# Altium PCB FLX-2282-611-PCBV3.3.PcbDoc
Units mm, origin at the board's own origin, x right, y up, seen from the top; angles counter-clockwise.
Board outline 23.4 x 79.5 mm, 2 copper layers (Top Side, Bottom Side), stack 1.879 mm thick; 14 components, 6 nets, 36 pads, 52 vias.
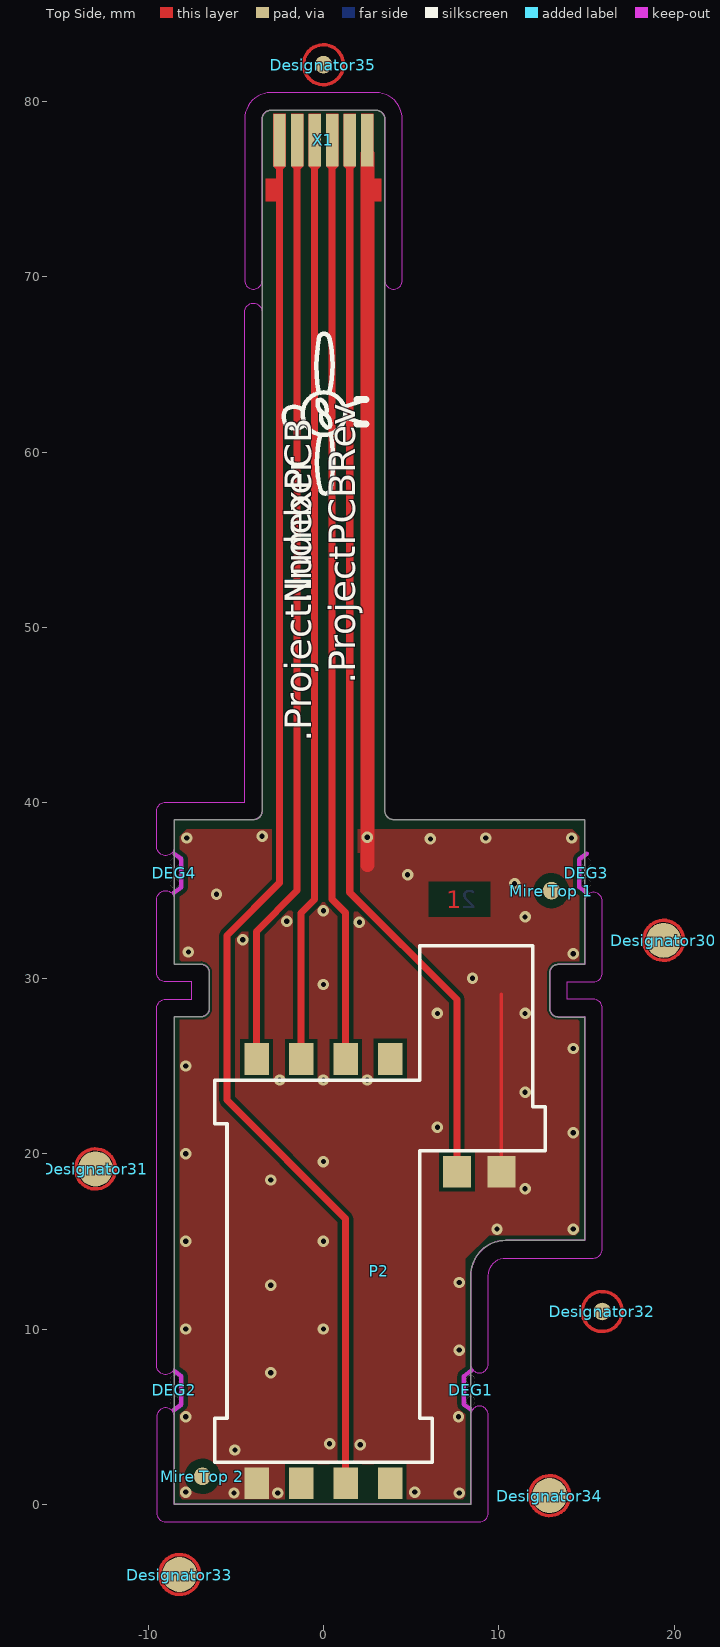
[diagram p0: Top Side view]
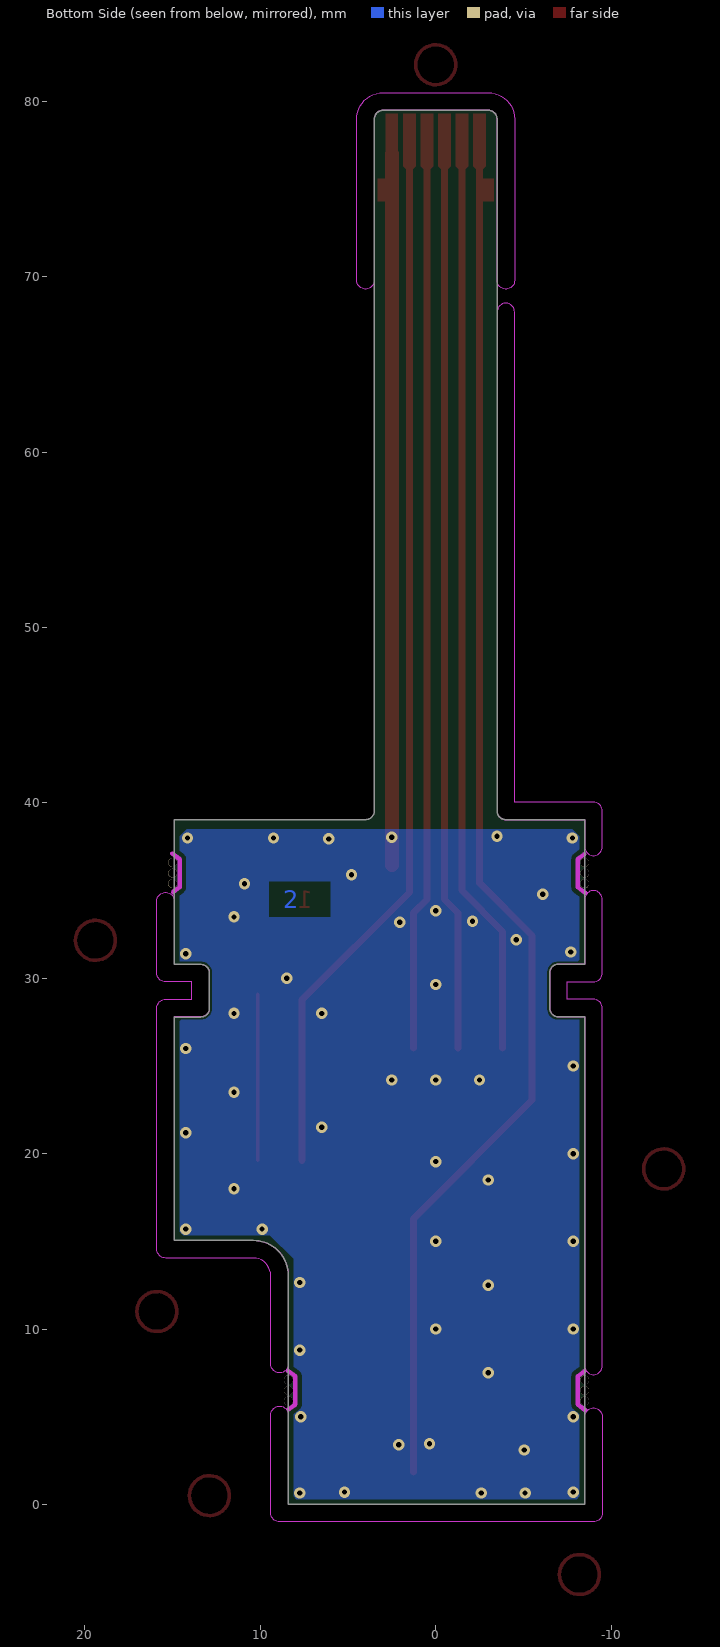
[diagram p1: Bottom Side view, seen from below]

## Layer stack, top to bottom
Top Solder: solder mask 0.012, WE-SM-0001, Dk 4.3
Top Side: signal copper 0.035
Coverlay: core 0.05, WE-PI-0103, Dk 4.188
Adesive: core 0.254, WE-PI-0103, Dk 4.188
Stifener: core 0.02, WE-PI-0103, Dk 4.188
Polyimide: core 1.5, WE-PI-0103, Dk 4.188
Bottom Side: signal copper 0.02
Bottom Solder: solder mask 0.015, WE-SM-0001, Dk 4.3

## Board outline
-8.5,0 -8.5,27.8 -8.5,27.806 -7,27.806 ccw(c-7,28.306) -6.5,28.306 -6.5,30.306 ccw(c-7,30.306) -7,30.806 -8.5,30.806 -8.5,30.8 -8.5,39.05 -4,39.05 ccw(c-4,39.55) -3.5,39.55 -3.5,79 cw(c-3,79) -3,79.5 3,79.5 cw(c3,79) 3.5,79 3.5,39.55 ccw(c4,39.55) 4,39.05 14.9,39.05 14.9,30.8 14.9,30.794 13.4,30.794 ccw(c13.4,30.294) 12.9,30.294 12.9,28.294 ccw(c13.4,28.294) 13.4,27.794 14.9,27.794 14.9,27.8 14.9,15.05 10.4,15.05 ccw(c10.4,13.05) 8.4,13.05 8.4,0
cut-out: -9.5,-0.5 ccw(c-9,-0.5) -9,-1 8.9,-1 ccw(c8.9,-0.5) 9.4,-0.5 9.4,5.1 ccw(c8.9,5.1) 8.4,5.1 8.4,0 -8.5,0 -8.5,5 ccw(c-9,5) -9.5,5
cut-out: -4.5,69.8 ccw(c-4,69.8) -3.5,69.8 -3.5,79 cw(c-3,79) -3,79.5 2.95,79.5 ccw(c2.95,80) 2.975,79.5 ccw(c3,80) 3,79.5 cw(c3,79) 3.5,79.001 cw(c3,79) 3.5,79 cw(c4,79) 3.5,79.001 3.5,79 3.5,69.8 ccw(c4,69.8) 4.5,69.8 4.5,79 ccw(c3,79) 3,80.5 ccw(c3,80) 2.975,80.5 ccw(c2.95,80) 2.95,80.5 -3,80.5 ccw(c-3,79) -4.5,79
cut-out: -9.5,7.9 -9.5,28.3 cw(c-9,28.3) -9,28.8 -7.5,28.8 -7.5,29.8 -9,29.8 cw(c-9,30.3) -9.5,30.3 -9.5,34.5 cw(c-9,34.5) -8.5,34.5 -8.5,30.8 -7,30.8 cw(c-7,30.3) -6.5,30.3 -6.5,28.3 cw(c-7,28.3) -7,27.8 -8.5,27.8 -8.5,7.9 cw(c-9,7.9)
cut-out: -9.5,37.5 -9.5,39.55 cw(c-9,39.55) -9,40.05 -4.5,40.05 -4.5,68 cw(c-4,68) -3.5,68 -3.5,39.55 cw(c-4,39.55) -4,39.05 -8.5,39.05 -8.5,37.5 cw(c-9,37.5)
cut-out: 8.4,8 ccw(c8.9,8) 9.4,8 9.4,13.05 cw(c10.4,13.05) 10.4,14.05 15.4,14.05 ccw(c15.4,14.55) 15.9,14.55 15.9,28.3 ccw(c15.4,28.3) 15.4,28.8 13.9,28.8 13.9,29.8 15.398,29.8 ccw(c15.4,30.3) 15.9,30.3 15.9,34.4 ccw(c15.4,34.4) 14.9,34.4 14.9,30.8 13.4,30.8 ccw(c13.4,30.3) 12.9,30.298 12.9,28.302 ccw(c13.4,28.3) 13.046,27.946 ccw(c13.4,28.3) 13.402,27.8 14.9,27.8 14.9,15.05 10.4,15.05 ccw(c10.4,13.05) 8.4,13.05
board region Flex: 3.5,73.8 3.5,40 -3.5,40 -3.5,73.8
board region Rigide: 3.5,40 3.5,39.55 3.51,39.452 3.584,39.272 3.722,39.134 3.902,39.06 4,39.05 14.9,39.05 14.9,30.794 13.4,30.794 13.302,30.784 13.122,30.709 12.984,30.571 12.91,30.391 12.9,30.294 12.9,28.294 12.91,28.196 12.984,28.016 13.122,27.878 13.302,27.803 13.4,27.794 14.9,27.8 14.9,15.05 10.4,15.05 10.204,15.04 9.819,14.964 9.457,14.814 9.131,14.596 8.854,14.319 8.636,13.993 8.486,13.631 8.41,13.246 8.4,13.05 8.4,0 -8.5,0 -8.5,27.806 -7,27.806 -6.902,27.816 -6.722,27.891 -6.584,28.029 -6.51,28.209 -6.5,28.306 -6.5,30.306 -6.51,30.404 -6.584,30.584 -6.722,30.722 -6.902,30.797 -7,30.806 -8.5,30.8 -8.5,39.05 -4,39.05 -3.902,39.06 -3.722,39.134 -3.584,39.272 -3.51,39.452 -3.5,39.55 -3.5,40
board region Connector: -3.5,73.8 -3.5,79 -3.5,79.099 -3.424,79.283 -3.283,79.424 -3.099,79.5 -3,79.5 3,79.5 3.099,79.5 3.283,79.424 3.424,79.283 3.5,79.099 3.5,79 3.5,73.8

## Design rules (kind name [scope] priority, off if disabled: settings)
AssemblyTestpoint [All] p1: testpointundercomponent=TRUE minsize=1 maxsize=2.54 preferedsize=1.524 minholesize=0 maxholesize=1.016 preferedholesize=0.813 testpointgrid=0.025 usegrid=TRUE gridtolerance=0 allowsidetop=TRUE allowsidebottom=TRUE minspacing=1.27 compbodyclearance=1
BoardOutlineClearance BoardOutlineClearance_DEG2 [Name='Free-DEG'] p1: gap=-2
BoardOutlineClearance BoardOutlineClearance_DEG [InComponent('DEG*')] p2: gap=0
BoardOutlineClearance [All] p3: gap=0.15 except(0: Arc-SplitContinuation Track-SplitContinuation SMDPad-SplitContinuation THPad-SplitContinuation Via-SplitContinuation Fill-SplitContinuation Poly-SplitContinuation Region-SplitContinuation Text-SplitContinuation; 0.3: Text-OutlineEdge Text-CutoutEdge Text-CavityEdge Text-SplitBarrior)
Clearance [All] p1: gap=0.25 except(0.15: Arc-Region Track-Region SMDPad-Region THPad-Region Via-Region Fill-Region Poly-Region Region-Region)
Clearance Clearance_RF [InNet('BLE_OUT') or InNet('BLE_RF')or InNet('BLE_ANT')] p2: gap=0.15
Clearance Clearance_DEGRAP [InComponent('DEG*')] p3: gap=0
ComponentClearance ComponentClearance_DEGG [InComponent('DEG*')] p1: gap=0 collisioncheckmode=3 verticalgap=0 showdistances=FALSE
ComponentClearance ComponentClearance_DEGG_1 [InComponent('Mire Top 2')] p2: gap=-40 collisioncheckmode=3 verticalgap=-40 showdistances=FALSE
ComponentClearance [All] p3: gap=0.3 collisioncheckmode=3 verticalgap=0.254 showdistances=FALSE
DiffPairsRouting [All] p1: maxlimit=0.254 minlimit=0.254 mostfreqgap=0.254 toplayer_minwidth=0.33 toplayer_maxwidth=0.33 toplayer_prefwidth=0.33 bottomlayer_minwidth=0.33 bottomlayer_maxwidth=0.33 bottomlayer_prefwidth=0.33 maxuncoupledlength=12.7
FabricationTestpoint [All] p1: side=3 testpointundercomponent=TRUE minsize=1 maxsize=2.54 preferedsize=1.524 minholesize=0 maxholesize=1.016 preferedholesize=0.813 testpointgrid=0.025 allowsidetop=TRUE allowsidebottom=TRUE usegrid=TRUE gridtolerance=0 minspacing=1.27 compbodyclearance=1 boardedgeclearance=1 padholecenterclearance=1
HoleSize [All] p1: absolutevalues=TRUE maxlimit=250 minlimit=0.1 maxpercent=80.000 minpercent=20.000
HoleToHoleClearance mdViaViaSameLayer [All] p1: gap=0.203 allowstackedmicrovias=TRUE
HoleToHoleClearance [All] p2: gap=0.254 allowstackedmicrovias=TRUE
MatchedLengths [All] p1: tolerance=45 checknetsindiffpair=TRUE checkdiffpairvsdiffpair=FALSE checkxsignals=FALSE checkothers=FALSE
MinimumSolderMaskSliver [All] p1: minsoldermaskwidth=0.075
PasteMaskExpansion [All] p1: expansion=-0.05
PolygonConnect ThermalVias [IsVia] p1: connectstyle=Direct reliefconductorwidth=0.254 reliefentries=4 polygonreliefangle="90 Angle" airgapwidth=0.254
PolygonConnect [All] p2: connectstyle=Direct reliefconductorwidth=0.125 reliefentries=4 polygonreliefangle="90 Angle" airgapwidth=0.254
RoutingVias [All] p1: holewidth=0.3 width=0.65 viastyle="Through Hole" minholewidth=0.1 minwidth=0.25 maxholewidth=49 maxwidth=50
SilkToSilkClearance [All] p1 off: silktosilkclearance=0
SilkToSolderMaskClearance [IsPad] p1 off: minsilkscreentomaskgap=0 clearancetoexposedcopper=TRUE
SolderMaskExpansion [All] p1: expansion=0.075
Width [All] p1: maxlimit=5 minlimit=0.15 preferedwidth=0.25
20 further rules are at their usual default settings.

## Classes and differential pairs
component class "Folio 01": DEG1 DEG2 DEG3 DEG4 "Mire Top 1" "Mire Top 2" P2 X1

## Components (designator, comment, footprint, x,y, rotation, side; value= is the part's Value field where it differs from the comment)
DEG1 "DNI" "DEGRAPAGE 3 x 0.5" 8.4,6.5 r0 top
DEG2 "DNI" "DEGRAPAGE 3 x 0.5" -8.5,6.5 r180 top
DEG3 "DNI" "DEGRAPAGE 3 x 0.5" 15,36 r0 top
DEG4 "DNI" "DEGRAPAGE 3 x 0.5" -8.5,36 r180 top
Designator30 "Comment" MIRE#1 19.4,32.165 r0 top
Designator31 "Comment" MIRE#1 -13,19.13 r0 top
Designator32 "Comment" MIRE#2 15.9,11 r0 top
Designator33 "Comment" MIRE#1 -8.2,-4 r0 top
Designator34 "Comment" MIRE#1 12.9,0.5 r0 top
Designator35 "Comment" MIRE#2 0,82.1 r0 top
"Mire Top 1" "DNI" MIRE#3 13,35 r90 top
"Mire Top 2" "DNI" MIRE#3 -6.9,1.6 r90 top
P2 "7311S0725A01LF" 7311S0725A01LF 0,13.3 r270 top
X1 "HFW6R-1STE1H1LF" FPC_HFW6R-1STE1H1LF 0,79.4 r0 top

## Footprints (in the part's own frame and the unit in brackets; to place one, negate y for a bottom-side part, rotate by r counter-clockwise, add the part's x,y. Pads: shape width x height; smd on the part's side, far side on the other; paste and mask are expansions set on the pad)
7311S0725A01LF [mm] "7311S0725A01LF"
  rect 1.8x1.4 smd: ISO_C1(-12.1,-3.81) ISO_C2(-12.1,-1.27) ISO_C3(-12.1,1.27) ISO_C4(-12.1,3.81) ISO_C5(12.1,-3.81) ISO_C6(12.1,-1.27) ISO_C7(12.1,1.27) ISO_C8(12.1,3.81)
  rect 1.8x1.6 smd: P1(-5.68,7.62) P2(-5.68,10.16)
  silkscreen extent -18.55,-6.2 10.9,12.65, body extent -18.52,-6.2 12.72,12.65, height 2.6
"DEGRAPAGE 3 x 0.5" [mm] "4 TROUS DIAMETRE 0.5mm"
  round 0.5 hole 0.5 unplated paste+0 mask+0: 0(0,-0.6) 0(0,0) 0(0,0.6)
  Keep-Out Layer lines w0.254: -0.024,-1.082 -0.4,-0.8 -0.4,0.8 0.024,1.118
  body extent -0.25,-0.85 0.25,0.85, height 0.2
FPC_HFW6R-1STE1H1LF [mm] "19826331"
  rect 0.7x3 smd paste+0: 1(-2.5,-1.6) 2(-1.5,-1.6) 3(-0.5,-1.6) 4(0.5,-1.6) 5(1.5,-1.6) 6(2.5,-1.6)
  Top Side region: -2.85,-3.1 -2.65,-3.3 -2.65,-3.8 -3.3,-3.8 -3.3,-5.1 -2.65,-5.1 -2.65,-5.6 -2.35,-5.6 -2.35,-3.3 -2.15,-3.1 -2.15,-0.1 -2.85,-0.1 -2.85,-3.1
  Top Side region: -1.85,-3.1 -1.65,-3.3 -1.65,-5.6 -1.35,-5.6 -1.35,-3.3 -1.15,-3.1 -1.15,-0.1 -1.85,-0.1 -1.85,-3.1
  Top Side region: -0.85,-3.1 -0.65,-3.3 -0.65,-5.6 -0.35,-5.6 -0.35,-3.3 -0.15,-3.1 -0.15,-0.1 -0.85,-0.1 -0.85,-3.1
  Top Side region: 0.15,-3.1 0.35,-3.3 0.35,-5.6 0.65,-5.6 0.65,-3.3 0.85,-3.1 0.85,-0.1 0.15,-0.1 0.15,-3.1
  Top Side region: 1.15,-3.1 1.35,-3.3 1.35,-5.6 1.65,-5.6 1.65,-3.3 1.85,-3.1 1.85,-0.1 1.15,-0.1 1.15,-3.1
  Top Side region: 2.85,-3.1 2.65,-3.3 2.65,-3.8 3.3,-3.8 3.3,-5.1 2.65,-5.1 2.65,-5.6 2.35,-5.6 2.35,-3.3 2.15,-3.1 2.15,-0.1 2.85,-0.1 2.85,-3.1
  body extent -3.5,-5.8 3.5,-0.1, height 0.04
MIRE#1 [mm] "Mire"
  round 2 smd mask+0.5: ""(0,0)
  Top Side circle w0.2: c0,0 r1.14
MIRE#2 [mm] "Mire"
  round 1 smd mask+0.5: ""(0,0)
  Top Side circle w0.2: c0,0 r1.14
MIRE#3 [mm] "Mire dans Polygone - 1mm/2mm - Validee Indus"
  round 1 smd paste+0 mask+0.4: 0(0,0)
  Top Side pour cut-out: -0.995,-0.105 -0.987,-0.168 -0.981,-0.195 -0.972,-0.234 -0.966,-0.261 -0.955,-0.301 -0.944,-0.331 -0.929,-0.368 -0.918,-0.398 -0.898,-0.441 -0.868,-0.497 -0.844,-0.537 -0.814,-0.58 -0.795,-0.608 -0.748,-0.662 -0.713,-0.701 -0.671,-0.743 -0.611,-0.792 -0.578,-0.817 -0.531,-0.847 -0.488,-0.873 -0.442,-0.897 -0.406,-0.913 -0.368,-0.93 -0.327,-0.945 -0.287,-0.958 -0.253,-0.968 -0.217,-0.976 -0.175,-0.983 -0.136,-0.991 -0.069,-0.998 0.009,-1 0.126,-0.993 0.174,-0.985 0.221,-0.976 0.262,-0.965 0.319,-0.948 0.362,-0.933 0.417,-0.909 0.465,-0.885 0.512,-0.86 0.541,-0.84 0.578,-0.817 0.618,-0.785 0.654,-0.757 0.713,-0.701 0.775,-0.633 0.801,-0.599 0.83,-0.558 0.855,-0.519 0.876,-0.486 0.893,-0.448 0.917,-0.4 0.94,-0.342 0.96,-0.28 0.972,-0.234 0.99,-0.147 0.998,-0.07 1,0.002 0.995,0.093 0.984,0.182 0.972,0.232 0.957,0.289 0.943,0.331 0.921,0.391 0.893,0.448 0.866,0.502 0.828,0.56 0.793,0.611 0.742,0.67 0.681,0.731 0.631,0.776 0.578,0.817 0.538,0.845 0.504,0.864 0.465,0.886 0.432,0.902 0.391,0.92 0.341,0.94 0.299,0.954 0.256,0.968 0.207,0.979 0.157,0.987 0.106,0.995 0.034,1 -0.061,0.998 -0.138,0.991 -0.185,0.983 -0.246,0.97 -0.289,0.957 -0.343,0.941 -0.384,0.924 -0.434,0.901 -0.47,0.884 -0.51,0.861 -0.551,0.835 -0.595,0.805 -0.636,0.772 -0.682,0.731 -0.722,0.691 -0.778,0.63 -0.818,0.575 -0.844,0.537 -0.868,0.497 -0.902,0.432 -0.923,0.384 -0.946,0.325 -0.964,0.265 -0.977,0.215 -0.995,0.1 -0.999,0.066 -1.001,0.009

## Part data
DEG1 DEG2 DEG3 DEG4: "Dégrapage (Breakout Tab)"
"Mire Top 1" "Mire Top 2": library part Mire, "Mire"
P2: "8 Positions connecteur de carte Micro SIM Montage en surface à angle droit Or avec commutateur"
X1: library part FPC_HFW6R-1STE1H1LF, "Connecteur FCC 6pts 1mm - bottom contect- right angle - 6x1mm"

## Via types
v1: diameter 0.65, hole 0.3, Top Side to Bottom Side, tented both sides, 52 vias

## Nets (pads, with @x,y where several pads share a name; then routed paths per layer and width w, separated by ;. In a path a pad name is that pad's centre, name@x,y a point inside that pad or via, vN(x,y) a via of type N, cw(c..) or ccw(c..) an arc to the next point about the centre after c; other vN are vias at no path point)
GND: P2.ISO_C5 P2.P2 X1.6 | length 50
  Top Side w0.2: P2.P2@10.15,19.615 10.15,29.1
  Top Side w0.8: 2.5,36.45 v1(2.5,38.05) X1.6@2.5,77
  other v1: -5.1,0.65 -2.6,0.65 7.75,0.65 -7.85,0.7 5.2,0.7 -5.05,3.1 2.1,3.4 0.35,3.45 -7.85,5 7.7,5 -3,7.5 7.75,8.8 -7.85,10 0,10 -3,12.5 7.75,12.65 -7.85,15 0,15 9.9,15.7 14.25,15.7 11.5,18 -3,18.5 0,19.55 -7.85,20 14.25,21.2 6.5,21.5 11.5,23.5 -2.5,24.2 0,24.2 2.5,24.2 -7.85,25 14.25,26 6.5,28 11.5,28 0,29.65 8.5,30 14.25,31.4 -7.7,31.5 -4.6,32.2 2.05,33.2 -2.1,33.25 11.5,33.5 0,33.85 -6.1,34.8 10.9,35.4 4.8,35.9 6.1,37.95 -7.8,38 9.25,38 14.15,38 -3.5,38.1
MCU_SC_PRES: P2.ISO_C1 X1.2 | length 51.9
  Top Side w0.4: P2.ISO_C1@-3.82,26.035 -3.82,32.68 -1.5,35 X1.2@-1.5,77
SC_PRES_SW: P2.P1 X1.5 | length 59.9
  Top Side w0.4: X1.5@1.5,77 1.5,34.9 7.61,28.79 P2.P1@7.61,19.615
SC_RST: P2.ISO_C2 X1.3 | length 51.3
  Top Side w0.4: P2.ISO_C2@-1.28,26.035 -1.28,33.72 -0.5,34.5 X1.3@-0.5,77
SC_USART_CLK: P2.ISO_C3 X1.4 | length 51.3
  Top Side w0.4: X1.4@0.5,77 0.5,34.5 1.26,33.74 P2.ISO_C3@1.26,26.035
SC_USART_TX: P2.ISO_C7 X1.1 | length 79.2
  Top Side w0.4: X1.1@-2.5,77 -2.5,35.45 -5.5,32.45 -5.5,23.05 1.26,16.29 P2.ISO_C7@1.26,1.835
pads on no net: "Mire Top 1.0" "Mire Top 2.0" DEG1.0 DEG2.0 DEG3.0 DEG4.0 Designator30. Designator31. Designator32. Designator33. Designator34. Designator35. P2.ISO_C4 P2.ISO_C6 P2.ISO_C8

## Polygon pours and split planes (outlines as drawn)
GND on Top Side "TOP_GND" (solid, remove dead copper, pour order 0): -7.8,38.5 -8.2,38.1 -8.2,0.45 -8.05,0.3 7.95,0.3 8.1,0.45 8.1,14 9.45,15.35 14.4,15.35 14.6,15.55 14.6,38.1 14.2,38.5
GND on Bottom Side "BOT_GND" (solid, remove dead copper, pour order 2): -7.8,38.5 -8.2,38.1 -8.2,0.45 -8.05,0.3 7.95,0.3 8.1,0.45 8.1,14 9.45,15.35 14.4,15.35 14.6,15.55 14.6,38.1 14.2,38.5

## Other copper
Top Side:
  pour cut-out: -0.4,2.3 3,2.3 3,0 -0.4,0
  pour cut-out: -2.5,37.15 -2.5,35.45 -5.3,32.65 -3.85,32.65 -2.65,33.85 -1.15,33.85 -0.65,34.35 0.7,34.35 1.25,33.8 2.6,33.8 2.1,34.3 2.1,37.15
  text "1" at 7,34 h1
Bottom Side:
  text "2" at 8.7,34 h1
Multi-Layer:
  pour cut-out: 6,35.5 6,33.5 9.5,33.5 9.5,35.5

## Silkscreen, mask and mechanical layers (free items; w line width, h text height)
Top Overlay:
  circle w0.254: c0.026,62.203 r1.217
  lines w0.254: -2.144,61.579 cw(c-1.411,62.018) -2.174,62.403 cw(c-1.676,61.875) -1.175,62.401 ; -2.092,61.552 ccw(c-1.606,62.043) -1.074,61.603 ; -0.318,62.956 ccw(c0.312,62.788) 0.026,62.203 cw(c-0.259,61.617) 0.37,61.45 ; -0.28,63.41 cw(c8.802,64.881) -0.265,66.44 cw(c0.035,66.461) 0.321,66.548 cw(c-5.835,64.966) 0.326,63.403 ; -0.174,61.003 ccw(c5.988,59.439) -0.169,57.857 ccw(c0.118,57.945) 0.417,57.966 ccw(c-8.65,59.525) 0.432,60.995 ; -0.174,63.003 cw(c-0.459,62.417) 0.128,62.136 ; -0.09,62.237 ccw(c0.512,61.988) 0.226,61.403 ; 1.226,62.003 2.126,61.703 ; 1.226,62.603 2.126,62.903
  lines w0.4: 1.926,61.603 2.426,61.603 ; 1.926,63.003 2.426,63.003
  text ".IndexPCB" at -0.7,51.4 h1.52 r90
  text ".ProjectPCBRev" at 1.8,46.8 h1.52 r90
  text ".ProjectNumber" at -0.7,43.5 h1.52 r90
02 - Outline:
  lines w0.2: -8.5,27.8 -8.5,0 8.4,0 ; -8.5,27.806 -7,27.806 ccw(c-7,28.306) -6.5,28.306 -6.5,30.306 ccw(c-7,30.306) -7,30.806 -8.5,30.806 ; -8.5,30.8 -8.5,39.05 -4,39.05 ccw(c-4,39.55) -3.5,39.55 -3.5,79 cw(c-3,79) -3,79.5 3,79.5 cw(c3,79) 3.5,79 3.5,39.55 ccw(c4,39.55) 4,39.05 14.9,39.05 14.9,30.8 ; 14.9,27.794 13.4,27.794 cw(c13.4,28.294) 12.9,28.294 12.9,30.294 cw(c13.4,30.294) 13.4,30.794 14.9,30.794 ; 14.9,27.8 14.9,15.05 10.4,15.05 ccw(c10.4,13.05) 8.4,13.05 8.4,0 ; 8.4,0 8.4,0
03 - DXF:
  drawing of 848 lines, arcs and shapes, not listed
10 - Spec PCB:
  drawing of 163 lines, arcs and shapes, not listed
  text "PCB DEFINITION" at 53.043,86.758 h2
  text "ROHS            UL94V0                 TG>=150°C" at 50.113,84.748 h1.3
  text "X" at 48.813,84.648 h1.3
  text "X" at 65.42,84.648 h1.3
  text "LOW CTE      SMI" at 50.113,83.748 h1.3
  text "X" at 48.813,83.648 h1.3
  text "RIGIDE          FLEX RIGID          FLEX" at 50.113,82.718 h1.3
  text "X" at 56.31,82.638 h1.3
  text "X" at 65.45,82.6 h1.3
  text "if flex, kapton thickness :" at 54.113,81.668 h1.3
  text "FLEX RIGIDE - 3 zones" at -76.5,81 h3
  text "HAL                Electroless NI/AU" at 50.113,80.668 h1.3
  text "X" at 56.313,80.558 h1.3
  text "ELECTRICAL TEST : To be done on all pcb 100%" at 50.123,79.338 h1.3
  text "X" at 48.823,79.238 h1.3
  text "DATASHEET OF LAMINATE TO BE SUPPLIED" at 50.123,77.958 h1.3
  text "X" at 48.833,77.828 h1.3
  text "CONTROLLED IMPEDANCE" at 50.123,76.628 h1.3
  text "RIGIDE" at -65,76 h1
  text "FLEX - FPC" at -53,76 h1
  text "CONNECTOR" at -38.5,76 h1
  text "CONNECTOR / REGION" at 10,75.9 h2
  text "COC CERTIFICATE OF CONFORMITY" at 50.103,75.198 h1.3
  text "X" at 48.803,75.098 h1.3
  text "Cover film" at -82,74 h1
  text "12.5" at -64,74 h1
  text "12.5" at -51,74 h1
  text "12.5" at -36.5,74 h1
  text "IMPEDANCE TEST" at 50.113,73.878 h1.3
  text "CERTIFICATE OF SOLDERABILITY" at 50.113,72.613 h1.3
  text "AD" at -82,72 h1
  text "25" at -63.5,72 h1
  text "25" at -50,72 h1
  text "METALLOGRAPHIC TEST REPORT" at 50.113,71.358 h1.3
  text "MATERIAL CERTIFICATES" at 50.113,70.058 h1.3
  text "COPPER" at -82,70 h1
  text "35" at -63.5,70 h1
  text "35" at -50,70 h1
  text "35" at -35.5,70 h1
  text "IONIC CONTAMINATION TEST REPORT" at 50.123,68.738 h1.3
  text "BASE PI" at -82,68 h1
  text "50" at -63.5,68 h1
  text "50" at -50,68 h1
  text "50" at -35.5,68 h1
  text "CONTROLLED DIMENSION" at 50.103,67.353 h1.3
  text "X" at 48.793,67.263 h1.3
  text "PP" at -82,66 h1
  text "80" at -63.5,66 h1
  text "OPERATING TEMPERATURE :" at 50.08,65.993 h1.3
  text "0..70°C" at 67.59,65.993 h1.3
  text "IPC A600 current revision level B" at 50.103,64.548 h1.3
  text "X" at 48.803,64.448 h1.3
  text "CORE" at -82,64 h1
  text "1500" at -64.5,64 h1
  text "COPPER" at -82,62 h1
  text "35" at -63.5,62 h1
  text "TRACK WITH AND SPACING" at 51.45,61.75 h2
  text "SOLDER RESIST" at -82,60 h1
  text "20" at -63.5,60 h1
  text "20" at -49.5,60 h1
  text "MINIMAL TRACK WIDTH" at 49.1,59.283 h1.3
  text "150µm" at 63.31,59.263 h1.3
  text "PI" at -82,58 h1
  text "225" at -36.5,58 h1
  text "MINIMAL CLEARANCE" at 49.073,57.849 h1.3
  text "150µm" at 63.35,57.813 h1.3
  text "FINISHED" at -82.5,55.5 h1
  text "1730+/-10%" at -65.5,55.5 h1
  text "110+/-30%" at -52,55.5 h1
  text "300+/-30%" at -38.5,55.5 h1
  text "FINISHED" at 57.45,53.75 h2
  text "FLEX FPC / REGION" at 5.6,52.678 h2
  text "TOP SOLDER RESIST" at 50.103,52.029 h1.3
  text "GREEN" at 65.36,52.043 h1.3
  text "X" at 48.803,51.929 h1.3
  text "BOTTOM SOLDER RESIST" at 50.103,50.399 h1.3
  text "GREEN" at 65.41,50.413 h1.3
  text "X" at 48.803,50.299 h1.3
  text "WHITE" at 65.4,48.883 h1.3
  text "TOP SILSCREEN" at 50.113,48.819 h1.3
  text "X" at 48.793,48.668 h1.3
  text "BOTTOM SILKSCREEN" at 50.093,47.179 h1.3
  text "WHITE" at 65.45,47.173 h1.3
  text "VCUT" at 58.123,45.669 h1.3
  text "MILLING" at 50.123,45.619 h1.3
  text "X" at 48.823,45.569 h1.3
  text "COTATION IN mm" at 54.45,42.75 h2
  text "ON TOP SILKSCREEN" at 51.45,39.75 h2
  text "PCB Supplyer mark" at 59.954,37.75 h1
  text "DATE CODE (WW = Week / YY = year)" at 54.574,34.75 h1
  text "NI/AU" at 59.74,30.43 h2
  text "TOP            : NI 120..240u" at 52.29,28.18 h1.3
  text "BOTTOM    : NI 120..240u" at 52.29,27.18 h1.3
  text "DATE CODE (WW=Week YY=Year)" at 39.8,18.85 h2
  text "RIGIDE / REGION" at 18.3,17.128 h2
11 - Spec PCBA:
  drawing of 1169 lines, arcs and shapes, not listed
  text "3" at -19.984,90.872 h1.2
  text "4" at 7.016,90.81 h1.2
  text "PCBA DEFINITION" at 53.043,86.758 h2
  text "STICKER ON EACH PCBA WITH :" at 50.113,84.348 h1.3
  text "X" at 48.813,84.248 h1.3
  text "ALTYOR CODE+WEEK/YEAR+PCBA NUMBER" at 50.113,82.948 h1.3
  text "PCBA LABELLING ON TOP" at 50.113,81.118 h1.3
  text "X" at 48.813,81.018 h1.3
  text "RoHS DEIRECTIVE COMPLIANT" at 50.113,79.068 h1.3
  text "X" at 48.81,78.96 h1.3
  text "X" at 48.81,76.96 h1.3
  text "IPC IPC610 CURRENT REVISION CLASS 2" at 50.05,76.95 h1.3
  text "COMPONENTS WITH DNI /  IN COLUMN COMMENTS /  OF BOM MUST  /  NOT BE ASSEMBLED ON PCB" at 50.45,68.35 h1
  text ".IndexPCBA" at -37.95,-10.25 h2
  text ".ProjectBoardName" at -67.75,-10.45 h2
  text ".ProjectNumber" at -56.95,-10.45 h2
  text "-" at -40.75,-10.45 h2
  text ".Printout_Name" at -67.75,-14.25 h1.7
  text "TOLERANCE" at -40.577,-17.02 h0.7
  text "REVISION" at -32.577,-17.02 h0.7
  text "ALTYOR" at -83.35,-17.45 h2
  text "DATE" at -68.077,-17.52 h1
  text ".PCBDate" at -55.577,-17.52 h1
  text "121 Rue des Hetres" at -84.246,-18.337 h0.4
  text "45590 SAINT CYR EN VAL" at -84.278,-19.137 h0.4
  text "0.2mm" at -40.95,-19.75 h1.4
  text ".ProjectPCBRev" at -32.115,-19.792 h1.5
  text "DESSINATEUR" at -68.077,-20.52 h1
  text ".PCBAutor" at -55.577,-20.52 h1
  text "THIS DRAWING REMAINS PROPERTY OF PDCI-ALTYOR GROUP. IT MAY BE NEITHER COPIED NOR INFORMED TO THIRD PERSONS OR COMPETITORS WITHOUT OUR APPROVAL." at -22.165,-20.921 h0.7
12 - Cartouche PCB:
  drawing of 1150 lines, arcs and shapes, not listed
  text "3" at -19.984,90.872 h1.2
  text "4" at 7.016,90.81 h1.2
  text ".IndexPCB" at -37.95,-10.25 h2
  text ".ProjectBoardName" at -67.75,-10.45 h2
  text ".ProjectNumber" at -56.95,-10.45 h2
  text "-" at -40.75,-10.45 h2
  text ".Printout_Name" at -67.75,-14.25 h1.7
  text "TOLERANCE" at -40.577,-17.02 h0.7
  text "REVISION" at -32.577,-17.02 h0.7
  text "ALTYOR" at -83.35,-17.45 h2
  text "DATE" at -68.077,-17.52 h1
  text ".PCBDate" at -55.577,-17.52 h1
  text "121 Rue des Hetres" at -84.246,-18.337 h0.4
  text "45590 SAINT CYR EN VAL" at -84.278,-19.137 h0.4
  text "0.2mm" at -40.95,-19.75 h1.4
  text ".ProjectPCBRev" at -32.115,-19.792 h1.5
  text "DESSINATEUR" at -68.077,-20.52 h1
  text ".PCBAutor" at -55.577,-20.52 h1
  text "THIS DRAWING REMAINS PROPERTY OF PDCI-ALTYOR GROUP. IT MAY BE NEITHER COPIED NOR INFORMED TO THIRD PERSONS OR COMPETITORS WITHOUT OUR APPROVAL." at -22.165,-20.921 h0.7
14 - Milling:
  lines w1: -9,5 -9,-0.5 8.9,-0.5 8.9,5.1 ; -9,7.9 -9,28.3 -7,28.3 -7,30.3 -9,30.3 -9,34.5 ; -9,37.5 -9,39.55 -4,39.55 -4,68 ; -4,69.8 -4,79 cw(c-3,79) -3,80 2.95,80 ; 3,80 cw(c3,79) 4,79 4,69.8 ; 4,68 4,39.55 15.4,39.55 15.4,37.6 ; 8.9,8 8.9,13.05 cw(c10.4,13.05) 10.4,14.55 15.4,14.55 15.4,28.3 13.4,28.3 13.4,30.3 15.4,30.3 15.4,34.4
16 - Spec Panel:
  circle w0.254: c-6,2.5 r0.9
  circle w0.254: c-2.5,2.5 r0.9
  circle w0.254: c4.5,2.5 r0.9
  circle w0.254: c1,2.5 r0.9
  circle w0.254: c-6,9.5 r0.9
  circle w0.254: c-2.5,9.5 r0.9
  circle w0.254: c4.5,9.5 r0.9
  circle w0.254: c1,9.5 r0.9
  circle w0.254: c1,6 r0.9
  circle w0.254: c4.5,6 r0.9
  circle w0.254: c-2.5,6 r0.9
  circle w0.254: c-6,6 r0.9
  circle w0.254: c-6,16.4 r0.9
  circle w0.254: c-2.5,16.4 r0.9
  circle w0.254: c4.5,16.4 r0.9
  circle w0.254: c1,16.4 r0.9
  circle w0.254: c11.6,16.4 r0.9
  circle w0.254: c8.1,16.4 r0.9
  circle w0.254: c1,12.9 r0.9
  circle w0.254: c4.5,12.9 r0.9
  circle w0.254: c-2.5,12.9 r0.9
  circle w0.254: c-6,12.9 r0.9
  circle w0.254: c-6,23.4 r0.9
  circle w0.254: c-2.5,23.4 r0.9
  circle w0.254: c4.5,23.4 r0.9
  circle w0.254: c1,23.4 r0.9
  circle w0.254: c11.6,23.4 r0.9
  circle w0.254: c8.1,23.4 r0.9
  circle w0.254: c8.1,19.9 r0.9
  circle w0.254: c11.6,19.9 r0.9
  circle w0.254: c1,19.9 r0.9
  circle w0.254: c4.5,19.9 r0.9
  circle w0.254: c-2.5,19.9 r0.9
  circle w0.254: c-6,19.9 r0.9
  circle w0.254: c-5.8,30.5 r0.9
  circle w0.254: c-2.3,30.5 r0.9
  circle w0.254: c4.7,30.5 r0.9
  circle w0.254: c1.2,30.5 r0.9
  circle w0.254: c11.8,30.5 r0.9
  circle w0.254: c8.3,30.5 r0.9
  circle w0.254: c8.3,27 r0.9
  circle w0.254: c11.8,27 r0.9
  circle w0.254: c1.2,27 r0.9
  circle w0.254: c4.7,27 r0.9
  circle w0.254: c-2.3,27 r0.9
  circle w0.254: c-5.8,27 r0.9
  circle w0.254: c-5.6,34 r0.9
  circle w0.254: c-2.1,34 r0.9
  circle w0.254: c4.9,34 r0.9
  circle w0.254: c1.4,34 r0.9
  circle w0.254: c12,34 r0.9
  circle w0.254: c8.5,34 r0.9
  circle w0.254: c8.5,37.5 r0.9
  circle w0.254: c12,37.5 r0.9
  circle w0.254: c1.4,37.5 r0.9
  circle w0.254: c4.9,37.5 r0.9
  circle w0.254: c-2.1,37.5 r0.9
  circle w0.254: c-5.6,37.5 r0.9
  lines w0.254: -3.5,73.8 3.4,73.8 ; -3.45,77.55 -1.5,79.5 ; -3.4,40 3.4,40 ; -3.4,42 3.4,42 ; -3.4,44 3.4,44 ; -3.4,46 3.4,46 ; -3.4,48 3.4,48 ; -3.4,50 3.4,50 ; -3.4,52 3.4,52 ; -3.4,54 3.4,54 ; -3.4,56 3.4,56 ; -3.4,58 3.4,58 ; -3.4,60 3.4,60 ; -3.4,62 3.4,62 ; -3.4,64 3.4,64 ; -3.4,66 3.4,66 ; -3.4,68 3.4,68 ; -3.4,70 3.4,70 ; -3.4,72 3.4,72 ; -3.4,75.2 0.9,79.5 ; -3,40 -3,73.8 ; -2.45,73.85 3.1,79.4 ; -1,40 -1,73.8 ; -0.25,73.85 3.4,77.5 ; 1,40 1,73.8 ; 1.4,73.8 3.4,75.8 ; 3,40 3,73.8
Drill Drawing:
  circle w0.15: c13.871,-11.944 r0.556
  lines w0.15: 13.316,-10 14.427,-10 14.427,-8.889 13.316,-8.889 13.316,-10
  lines w0.381: 12.324,-13.25 74.295,-13.25 ; 12.324,-8.25 74.295,-8.25 ; 21.452,-15.75 21.452,-5.75 ; 30.417,-15.75 30.417,-5.75 ; 52.79,-15.75 52.79,-5.75 ; 61.168,-15.75 61.168,-5.75 ; 12.324,-15.75 74.295,-15.75 74.295,-5.75 12.324,-5.75 12.324,-15.75
  text "Symbol" at 13.824,-7.5 h1.2
  text "Count" at 22.202,-7.5 h1.2
  text "Finished Hole Size" at 31.167,-7.5 h1.2
  text "Plated" at 53.54,-7.5 h1.2
  text "Pad Shape" at 61.918,-7.5 h1.2
  text "12" at 22.202,-10 h1
  text "0,50mm" at 31.167,-10 h1
  text "NPTH" at 53.54,-10 h1
  text "Rounded" at 61.918,-10 h1
  text "52" at 22.202,-12.5 h1
  text "0,30mm" at 31.167,-12.5 h1
  text "PTH" at 53.54,-12.5 h1
  text "Rounded" at 61.918,-12.5 h1
  text "64 Total" at 22.202,-15 h1
18 - Cart PCB Miroir:
  drawing of 1244 lines, arcs and shapes, not listed
  text "-.IndexPCBA" at 30.45,-10.25 h2
  text ".ProjectNumber" at 48.25,-10.25 h2
  text ".ProjectBoardName" at 58.45,-10.25 h2
  text ".Printout_Name" at 58.55,-14.25 h1.7
  text ".Print_Date" at 46.923,-17.32 h1
  text "DATE" at 58.523,-17.32 h1
  text "ALTYOR" at 73.95,-17.75 h2
  text "121 Rue des Hetres" at 74.91,-18.447 h0.4
  text "45590 SAINT CYR EN VAL" at 74.942,-19.247 h0.4
  text "0.2mm" at 31.65,-19.75 h1.4
  text ".ProjectPCBRev" at 23.423,-19.82 h1.5
  text ".PCBAutor" at 47.023,-20.22 h1
  text "DESSINATEUR" at 58.623,-20.32 h1
  text "THIS DRAWING REMAINS PROPERTY OF PDCI-ALTYOR GROUP. IT MAY BE NEITHER COPIED NOR INFORMED TO THIRD PERSONS OR COMPETITORS WITHOUT OUR APPROVAL." at 12.25,-20.95 h0.7
19 - Carte 604:
  drawing of 1150 lines, arcs and shapes, not listed
  text "3" at -19.984,90.872 h1.2
  text "4" at 7.016,90.81 h1.2
  text ".IndexPCBA" at -37.95,-10.25 h2
  text ".ProjectBoardName" at -67.75,-10.45 h2
  text ".ProjectNumber" at -56.95,-10.45 h2
  text "-" at -40.75,-10.45 h2
  text ".Printout_Name" at -67.75,-14.25 h1.7
  text "TOLERANCE" at -40.577,-17.02 h0.7
  text "REVISION" at -32.577,-17.02 h0.7
  text "ALTYOR" at -83.35,-17.45 h2
  text "DATE" at -68.077,-17.52 h1
  text ".PCBDate" at -55.577,-17.52 h1
  text "121 Rue des Hetres" at -84.246,-18.337 h0.4
  text "45590 SAINT CYR EN VAL" at -84.278,-19.137 h0.4
  text "0.2mm" at -40.95,-19.75 h1.4
  text ".ProjectPCBRev" at -32.115,-19.792 h1.5
  text "DESSINATEUR" at -68.077,-20.52 h1
  text ".PCBAutor" at -55.577,-20.52 h1
  text "THIS DRAWING REMAINS PROPERTY OF PDCI-ALTYOR GROUP. IT MAY BE NEITHER COPIED NOR INFORMED TO THIRD PERSONS OR COMPETITORS WITHOUT OUR APPROVAL." at -22.165,-20.921 h0.7

## Dimensions
-4.2,73.8 to -3,79.5 on 10 - Spec PCB
-8.5,0 to 14.9,15.05 on 10 - Spec PCB
-8.5,0 to -4,40 on 10 - Spec PCB
-3.5,79 to 3.5,79 on 10 - Spec PCB
-4,40 to -4.2,73.8 on 10 - Spec PCB